# EAGLE board ESP Breakout Adapter - v2_0B - SPX3819 (EAGLE 7.3.0)
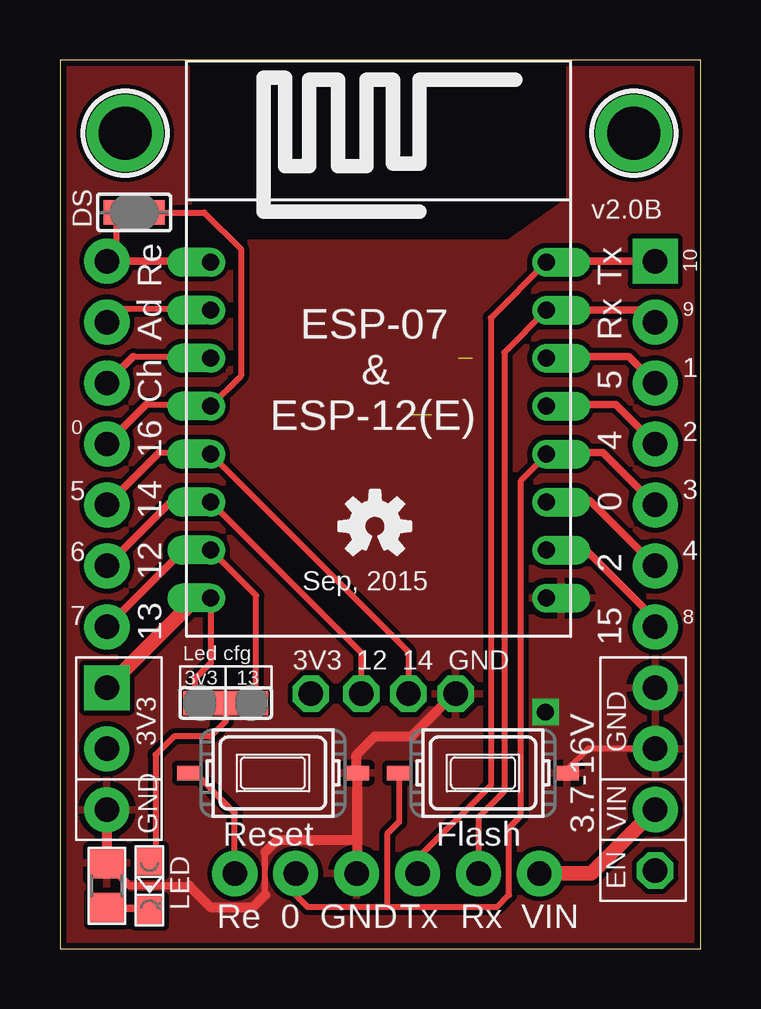
[diagram p0: board, top side]
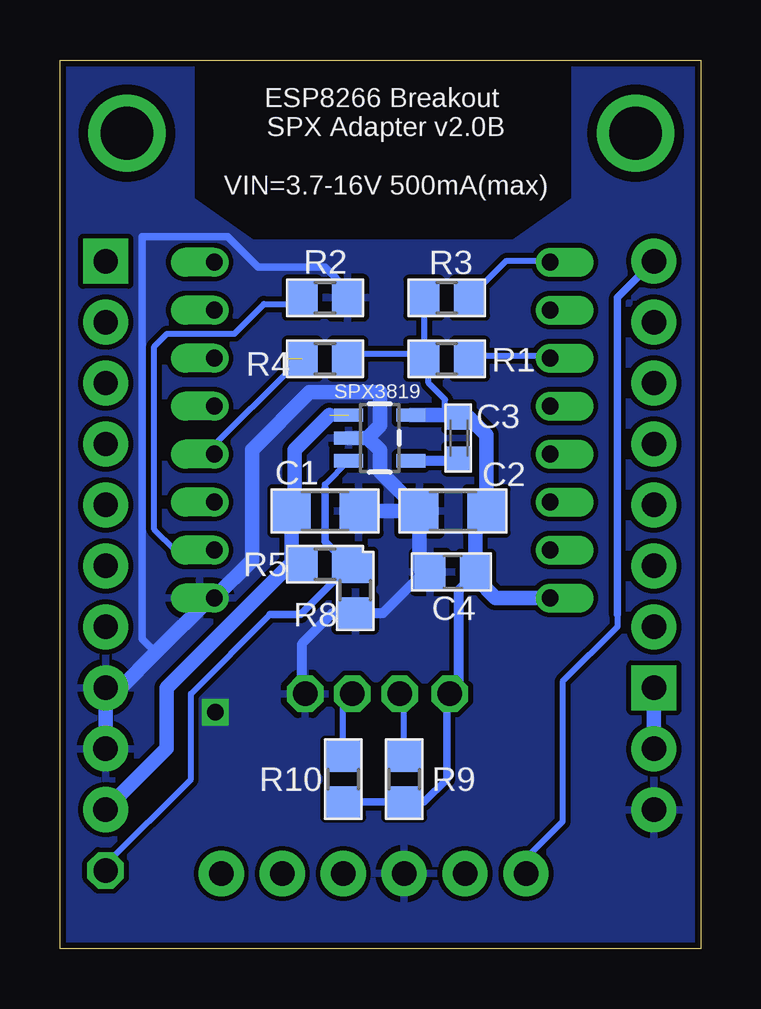
[diagram p1: board, bottom side, seen from below]

Size 26.72 x 37.05 mm. Coordinates in mm from the lower left corner, seen from the top.
Outline: 0,0 26.72,0 26.72,37.06 0,37.06 0,0
Copper layers (1*16): Top 0.035mm / dielectric 1.5mm / Bottom 0.035mm
Design rules "adafruit": minimum track width 10mil, minimum drill 15.5mil, track to track 8mil, track to pad 8mil, pad to pad 8mil, via to via 8mil, smd to smd 8mil, copper to edge 10mil, drill to drill 8mil, minimum pad ring 10mil, minimum via ring 8mil, stop-mask expansion 2mil, vias tented up to drill 20mil, thermal gap 10mil
Net classes: 1 a: width 0.203 mm, drill 0.305 mm, clearance 0.203 mm

## Footprints (pad centres in the part's own frame; a part is rotated, then mirrored left to right if it is on the bottom)
C1206 = smd 1.6 x 1.8: 1 -1.4,0; 2 1.4,0
C0603K = smd 1.05 x 1.08: 1 -0.875,0; 2 0.875,0
C0805 = smd 1.3 x 1.5: 1 -0.95,0; 2 0.95,0
SJ = smd 1.016 x 1.016: 1 -0.762,0; 2 0.762,0
SW_TACT_3X6 = smd 1 x 0.6: 1 -3.5,0; 2 3.5,0
1X02 = drill 1.016 pad 1.88: 1 0,0; 2 2.54,0
1X06 = drill 1.016 pad 1.88: 1 0,0; 2 2.54,0; 3 5.08,0; 4 7.62,0; 5 10.16,0; 6 12.7,0
1X01 = drill 1.016 octagon: 1 0,0
1X08 = drill 1.016 pad 1.88 square: 1 0,0 | drill 1.016 pad 1.88: 2 2.54,0; 3 5.08,0; 4 7.62,0; 5 10.16,0; 6 12.7,0; 7 15.24,0; 8 17.78,0
LED-805 = smd 1.2 x 1.2: A 0,-1.05; C 0,1.05
R0805 = smd 1.3 x 1.5: 1 -0.95,0; 2 0.95,0
SJ_2 = smd 1.016 x 1.016: 1 -1.27,0; 2 0,0; 3 1.27,0
SOT23-5 = smd 0.55 x 1.2: 1 -0.95,-1.3; 2 0,-1.3; 3 0.95,-1.3; 4 0.95,1.3; 5 -0.95,1.3
ESP-12 = drill 0.7 offset: ADC -7.1,3.8; CH_PD -7.1,1.8; GND 6.9,-8.2; GPIO0 6.9,-2.2; GPIO2 6.9,-4.2; GPIO4 6.9,1.8; GPIO5 6.9,-0.2; GPIO12 -7.1,-4.2; GPIO13 -7.1,-6.2; GPIO14 -7.1,-2.2; GPIO15 6.9,-6.2; GPIO16 -7.1,-0.2; RESET -7.1,5.8; RX 6.9,3.8; TX 6.9,5.8; VCC -7.1,-8.2
MOUNTINGHOLE_2.0_PLATED = drill 2.2 pad 3: P$1 0,0

## Placement (x,y rotation side)
C1  10µF  [C1206]  15.67,18.25 0 bottom
C2  10µF  [C1206]  10.34,18.25 180 bottom
C3  10nF  [C0603K]  10.08,21.3 270 bottom
C4  100nF  [C0805]  10.34,15.71 180 bottom
DS  [SJ]  3.1,30.7 180 top
FLASH  SW_TACT_2P-3X6  [SW_TACT_3X6]  17.64,7.33 180 top
JP1  GND | 5V  [1X02]  24.82,5.81 90 top
JP2  GND | 3V3  [1X02]  1.95,8.34 270 top
JP3  [1X06]  19.99,3.14 180 top
JP4  [1X01]  16.5,10.63 0 top
JP6  [1X01]  24.82,3.27 0 top
JP7  [1X01]  12.56,10.63 0 top
JP8  [1X01]  10.47,10.63 0 top
JP9  [1X08]  24.82,28.67 270 top
JP10  [1X08]  1.96,10.89 90 top
JP11  [1X01]  14.53,10.63 0 top
LED  [LED-805]  3.73,2.63 180 top
R1  0 Ohm  [R0805]  10.59,24.6 0 bottom
R2  0 Ohm  [R0805]  15.67,27.14 180 bottom
R3  10KOhm  [R0805]  10.59,27.14 180 bottom
R4  10KOhm  [R0805]  15.67,24.6 0 bottom
R5  10K  [R0805]  15.67,16.03 180 bottom
R7  1K  [R0805]  1.96,2.63 270 top
R8  10K  [R0805]  14.4,14.95 90 bottom
R9  10K  [R0805]  12.37,7.08 90 bottom
R10  10K  [R0805]  14.91,7.08 90 bottom
RESET  SW_TACT_2P-3X6  [SW_TACT_3X6]  8.88,7.33 180 top
SJ1  [SJ_2]  6.91,10.25 180 top
SPX3819  V_REG_LDOSMD  [SOT23-5]  13.39,21.3 270 bottom
U$1  ESP-12  [ESP-12]  13.39,22.82 0 top
U$3  [OSHW-LOGO-S]  13.13,17.62 0 top
U$4  MOUNTINGHOLE2.0  [MOUNTINGHOLE_2.0_PLATED]  2.72,34 0 top
U$5  MOUNTINGHOLE2.0  [MOUNTINGHOLE_2.0_PLATED]  23.93,34 0 top

## Library data of the parts
C1-C4 R1-R4 R7 = rcl
DS SJ1 = jumper
FLASH LED RESET = dp-devices
JP1-JP3 JP9 JP10 SPX3819 U$3 = SparkFun
JP4 JP6-JP8 JP11 = pinhead
R5 R8-R10 = resistor
U$1 = johs_esp8266_lib_frank_esp12e_mod; DIMENSIONS: 24.0 x 16.0 mm; PINS: 16; PITCH: 0.078" / 2 mm
U$4 U$5 = microbuilder

## Nets
ADC: JP10.7 U$1.ADC
CH_PD: JP10.6 R1.2 U$1.CH_PD
EN: JP6.1 R5.1 R8.2 SPX3819.3
GND [a]: C1.2 C2.2 C4.2 FLASH.1 JP1.2 JP2.2 JP3.4 JP4.1 JP9.8 R2.1 R7.1 R8.1 RESET.1 SPX3819.2 U$1.GND
GPIO0: FLASH.2 JP3.5 JP9.5 R4.1 U$1.GPIO0
GPIO2: JP9.6 U$1.GPIO2
GPIO4: JP9.4 U$1.GPIO5
GPIO5: JP9.3 U$1.GPIO4
GPIO12: JP7.1 JP10.3 R9.2 U$1.GPIO12
GPIO13: JP10.2 SJ1.1 U$1.GPIO13
GPIO14: JP10.4 JP11.1 R10.2 U$1.GPIO14
GPIO15: JP9.7 R2.2 U$1.GPIO15
GPIO16: DS.1 JP10.5 U$1.GPIO16
N$3: LED.C R7.2
N$4: LED.A SJ1.2
RESET: DS.2 JP3.6 JP10.8 R3.1 RESET.2 U$1.RESET
RX: JP3.2 JP9.2 U$1.RX
SET/BYP: C3.2 SPX3819.4
TX: JP3.3 JP9.1 U$1.TX
VCC: C2.1 C3.1 C4.1 JP2.1 JP8.1 JP10.1 R1.1 R3.2 R4.2 R9.1 R10.1 SJ1.3 SPX3819.5 U$1.VCC
VIN: C1.1 JP1.1 JP3.1 R5.2 SPX3819.1

## Tracks (layer width: path | path; a pad name or v marks a point on that pad's centre or on a via)
ADC
  Top 0.254: 2.51,26.68 6.23,26.68 U$1.ADC
  Top 0.305: 2.51,26.68 JP10.7
CH_PD
  Top 0.254: 3.05,24.68 6.23,24.68 U$1.CH_PD
  Top 0.305: 3.05,24.68 JP10.6
  Bottom 0.254: U$1.CH_PD 6.39,24.73 9.54,24.73 9.54,24.71 R1.2
EN
  Bottom 0.254: 17.96,13.93 21.26,10.63 21.26,7.08 24.82,3.52 JP6.1 | R8.2 14.59,15.9 R5.1 | 15.67,19.21 15.67,19.36 SPX3819.3
  Bottom 0.305: 15.67,19.21 15.67,16.98 R5.1 14.72,15.97 | 17.96,13.93 16.69,13.93 14.72,15.9 14.72,15.97 | 14.72,15.97
GND  (via drill 0.7)
  Top 0.254: JP1.2 22.03,8.35 21.14,7.46 FLASH.1 | 8.56,2.25 8.56,4.03
  Top 0.305: 5.39,2.63 2.91,2.63 R7.1
  Top 0.406: 12.38,4.54 RESET.1 12.37,7.34 12.37,8.09 13.13,8.85 14.66,8.85 16.5,10.7 JP4.1 | 12.38,4.54 12.38,3.27 | 5.39,2.63 6.27,1.74 8.05,1.74 8.56,2.25 | 8.56,4.03 9.07,4.54 12.38,4.54 | JP2.2 1.95,3.71
  Bottom 0.254: 14.72,26.57 R2.1 14.72,27.46
  Bottom 0.305: 14.72,27.46 15.67,28.41 18.47,28.41 19.74,29.68 23.29,29.68 23.29,12.92 22.72,12.35
  Bottom 0.406: C4.2 11.54,15.71 13.25,14 R8.1 15.35,14 16.62,12.73 16.62,10.76 JP4.1
  Bottom 0.61: C2.2 C1.2 | C2.2 11.99,18.25 12.24,18.5 | JP1.2 JP9.8 24.18,10.89 22.72,12.35 20.45,14.62 U$1.GND 18.72,16.19 18.72,20.79 16.31,23.2 13.39,23.2 13.39,21.81 13.89,21.3 | C2.2 11.74,15.91 11.48,15.91 C4.2 | SPX3819.2 13.89,21.3 | 13.89,21.3 13.39,20.79 13.39,19.9 C2.2
  other vias: 20.24,9.87
  pour Bottom: 0.18,0.22 26.59,0.22 26.59,36.79 21.26,36.79 21.26,31.21 18.72,29.43 7.8,29.43 5.26,31.21 5.26,36.79 0.18,36.79
  pour Top: 26.59,0.22 0.18,0.22 0.18,36.79 5.26,36.79 5.26,31.21 7.8,29.43 18.72,29.43 21.26,31.21 21.26,36.79 26.59,36.79
GPIO0  (1 unrouted)
  Top 0.254: 13.64,1.74 18.21,1.74 18.72,2.25 18.72,5.04 19.23,5.55 19.23,19.52 20.29,20.58 U$1.GPIO0 | 13.64,1.74 10.34,1.74 9.83,2.25 JP3.5 | FLASH.2 14.14,5.29 13.64,4.79 13.64,1.74
  Top 0.305: JP9.5 22.64,20.68 20.35,20.68 U$1.GPIO0
  Bottom 0.254: U$1.GPIO0 20.24,20.67 20.24,21.05 17.2,24.09 17.2,24.6
GPIO2
  Top 0.305: JP9.6 22.1,18.68 20.35,18.68 U$1.GPIO2
GPIO4
  Top 0.305: JP9.4 23.18,22.68 20.35,22.68 U$1.GPIO5
GPIO5
  Top 0.305: U$1.GPIO4 20.35,24.68 23.72,24.68 JP9.3
GPIO12
  Top 0.254: 4.67,18.68 6.23,18.68 U$1.GPIO12 12.56,12.35 JP7.1
  Top 0.305: 4.67,18.68 JP10.3
  Bottom 0.254: R9.2 12.37,10.44 JP7.1
GPIO13
  Top 0.254: 5.21,16.68 6.23,16.68 U$1.GPIO13 8.18,14.73 SJ1.1
  Top 0.305: 5.21,16.68 JP10.2
GPIO14
  Top 0.254: 4.13,20.68 6.23,20.68 U$1.GPIO14 14.53,12.38 JP11.1
  Top 0.305: 4.13,20.68 JP10.4
  Bottom 0.254: R10.2 14.91,10.25 JP11.1
GPIO15
  Top 0.305: JP9.7 24.82,13.73 21.92,16.62 U$1.GPIO15
  Bottom 0.254: U$1.GPIO15 21.92,16.62 22.78,17.49 22.78,25.11 22.26,25.63 22.26,25.64 19.44,25.64 19.44,25.66 18.21,26.89 16.88,26.89 R2.2
GPIO16
  Top 0.254: 3.59,22.68 6.23,22.68 U$1.GPIO16 7.54,23.88 7.54,29.17 6.02,30.7 DS.1
  Top 0.305: 3.59,22.68 JP10.5
N$3
  Top 0.305: R7.2 3.63,1.68 LED.C
N$4
  Top 0.254: 7.04,10.38 SJ1.2 6.91,9.49 6.27,8.85 4.75,8.85 3.99,8.09 3.99,3.93 LED.A
RESET
  Top 0.254: 6.17,28.67 6.24,28.67 U$1.RESET | RESET.2 5.51,7.46 7.29,5.67 JP3.6 | DS.2 2.34,29.05 JP10.8
  Top 0.305: JP10.8 6.17,28.67
  Bottom 0.254: U$1.RESET 6.35,28.68 8.1,28.68 R3.1 | 3.48,13.93 3.48,13.43 5.77,11.14 5.77,5.3 7.29,3.77 JP3.6
  Bottom 0.305: 3.48,13.93 3.48,27.14 JP10.8
RX
  Top 0.254: U$1.RX 18.53,24.87 18.53,6.57 17.45,5.49 JP3.2 | 24.32,26.62 JP9.2
  Top 0.305: 24.26,26.68 JP9.2 | U$1.RX 24.32,26.62
SET/BYP
  Bottom 0.305: 10.59,20.35 10.08,20.35 C3.2
  Bottom 0.406: SPX3819.4 10.59,20.35
TX
  Top 0.254: U$1.TX 17.96,26.3 17.96,6.82 14.91,3.77 JP3.3
  Top 0.305: JP9.1 20.33,28.67 U$1.TX
VCC
  Top 0.254: U$1.VCC 6.29,11.91 5.64,11.27 SJ1.3
  Top 0.61: JP10.1 5.75,14.68 6.23,14.68 U$1.VCC
  Bottom 0.254: R3.2 R1.1 11.35,24.79 | 10.67,22.25 10.67,22.9 11.35,23.59 11.35,24.79 | 11.35,24.79 14.91,24.79 R4.2 | 10.59,10.5 JP8.1
  Bottom 0.305: 10.59,10.5 10.59,7.08 11.54,6.13 R9.1 R10.1
  Bottom 0.406: JP8.1 10.08,11.01 10.08,14.95 9.64,15.39 9.39,15.65 C4.1
  Bottom 0.61: JP10.1 JP2.1 | U$1.VCC 8.55,14.62 9.32,15.39 9.64,15.39 | SPX3819.5 10.67,22.25 10.08,22.25 C3.1 9.69,22.17 8.94,21.42 C2.1 9.39,18.25 C4.1
VIN  (1 unrouted)
  Top 0.61: JP1.1 22.15,3.14 JP3.1
  Bottom 0.305: 17.15,16.09 17.07,16.09
  Bottom 0.61: 17.07,16.09 C1.1 16.94,18.38 16.94,20.79 15.48,22.25 | 17.07,16.09 22.28,10.89 22.28,8.35 JP1.1 | R5.2 17.01,16.03 17.07,16.09

## Text on the board
tPlace: v2.0B | Re | 10 | Tx | Ad | 9 | Rx | Ch | 1 | 5 | 0 | 16 | 4 | 2 | 5 | 14 | 3 | 0 | 6 | 12 | 2 | 4 | Sep, 2015 | 7 | 13 | 15 | 8 | Led cfg | 3V3 | 12 | 14 | GND | 3v3 | 13 | GND | 3V3 | VIN | GND | 3.7-16V | Reset | Flash | EN | Re | 0 | GND | Tx | Rx | VIN
bPlace: ESP8266 Breakout / SPX Adapter v2.0B / / VIN=3.7-16V 500mA(max) | SPX3819